# Altium PCB ahrs_v0.1.PcbDoc
Units mil, origin at the board's own origin, x right, y up, seen from the top; angles counter-clockwise.
Board outline 800 x 550 mil, 2 copper layers (Top Layer, Bottom Layer); 25 components, 35 nets, 127 pads, 20 vias.
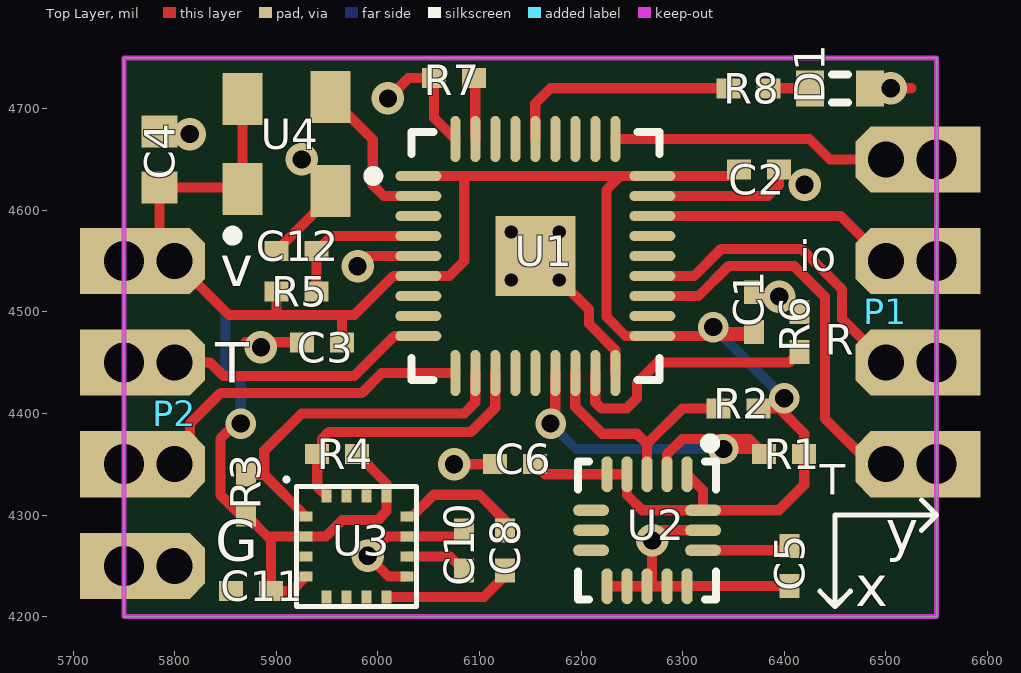
[diagram p0: Top Layer view]
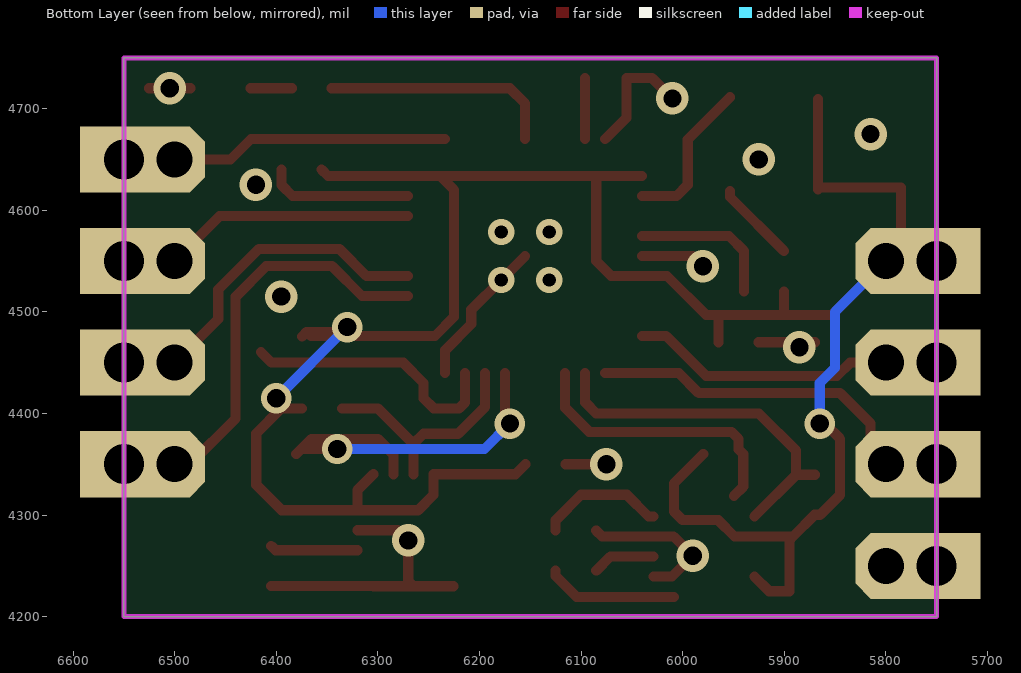
[diagram p1: Bottom Layer view, seen from below]

## Layer stack, top to bottom
Top Layer: signal copper 1.4
Dielectric: dielectric 12.6, FR-4, Dk 4.8
Bottom Layer: signal copper 1.4

## Board outline
5750,4200 6550,4200 6550,4750 5750,4750

## Design rules (kind name [scope] priority, off if disabled: settings)
AssemblyTestPointUsage [All] p0: scope1count=1 scope1_0_kind=Board scope1_0_value=Board scope2count=1 scope2_0_kind=Board scope2_0_value=Board commentlength=0
AssemblyTestpoint [All] p0: scope1count=1 scope1_0_kind=Board scope1_0_value=Board scope2count=1 scope2_0_kind=Board scope2_0_value=Board commentlength=0
Clearance [All] p0: scope1count=1 scope1_0_kind=Board scope1_0_value=Board scope2count=1 scope2_0_kind=Board scope2_0_value=Board commentlength=0 gap=7
Clearance [All] p1: gap=7
ComponentClearance [All] p0: scope1count=1 scope1_0_kind=Board scope1_0_value=Board scope2count=1 scope2_0_kind=Board scope2_0_value=Board commentlength=0 gap=0 collisioncheckmode=3
ComponentClearance [All] p1: gap=0 collisioncheckmode=3 verticalgap=0 showdistances=FALSE
DiffPairsRouting [All] p0: scope1count=1 scope1_0_kind=Board scope1_0_value=Board scope2count=1 scope2_0_kind=Board scope2_0_value=Board commentlength=0
FabricationTestPointUsage [All] p0: scope1count=1 scope1_0_kind=Board scope1_0_value=Board scope2count=1 scope2_0_kind=Board scope2_0_value=Board commentlength=0 valid=0 allowmultiple=FALSE
FabricationTestpoint [All] p0: scope1count=1 scope1_0_kind=Board scope1_0_value=Board scope2count=1 scope2_0_kind=Board scope2_0_value=Board commentlength=0 side=3 testpointundercomponent=TRUE minsize=40 maxsize=100 preferedsize=60 minholesize=0 maxholesize=40 preferedholesize=32 testpointgrid=1
FanoutControl Fanout_BGA [All] p0 off: scope1count=1 scope1_0_kind=Board scope1_0_value=Board scope2count=1 scope2_0_kind=Board scope2_0_value=Board commentlength=69 // Protel DXP Scope 1 Expression Was: IsBGA   Fanout_BGA (Default Rule)
FanoutControl Fanout_LCC [All] p0 off: scope1count=1 scope1_0_kind=Board scope1_0_value=Board scope2count=1 scope2_0_kind=Board scope2_0_value=Board commentlength=69 // Protel DXP Scope 1 Expression Was: IsLCC   Fanout_LCC (Default Rule)
FanoutControl Fanout_SOIC [All] p0 off: scope1count=1 scope1_0_kind=Board scope1_0_value=Board scope2count=1 scope2_0_kind=Board scope2_0_value=Board commentlength=71 // Protel DXP Scope 1 Expression Was: IsSOIC   Fanout_SOIC (Default Rule)
FanoutControl Fanout_Small [All] p0 off: scope1count=1 scope1_0_kind=Board scope1_0_value=Board scope2count=1 scope2_0_kind=Board scope2_0_value=Board commentlength=84 // Protel DXP Scope 1 Expression Was: (CompPinCount < 5)   Fanout_Small (Default Rule)
FanoutControl Fanout_Default [All] p0: scope1count=1 scope1_0_kind=Board scope1_0_value=Board scope2count=1 scope2_0_kind=Board scope2_0_value=Board commentlength=30 // Fanout_Default (Default Rule)
Height [All] p0: scope1count=1 scope1_0_kind=Board scope1_0_value=Board scope2count=1 scope2_0_kind=Board scope2_0_value=Board commentlength=0
HoleSize [All] p0: scope1count=1 scope1_0_kind=Board scope1_0_value=Board scope2count=1 scope2_0_kind=Board scope2_0_value=Board commentlength=0 absolutevalues=TRUE maxlimit=300 minlimit=0 maxpercent=80.000 minpercent=20.000
HoleSize [All] p1: absolutevalues=TRUE maxlimit=300 minlimit=0 maxpercent=80.000 minpercent=20.000
HoleToHoleClearance [All] p0: scope1count=1 scope1_0_kind=Board scope1_0_value=Board scope2count=1 scope2_0_kind=Board scope2_0_value=Board commentlength=0
LayerPairs [All] p0: scope1count=1 scope1_0_kind=Board scope1_0_value=Board scope2count=1 scope2_0_kind=Board scope2_0_value=Board commentlength=0 enforce=TRUE
MinimumSolderMaskSliver [All] p0: scope1count=1 scope1_0_kind=Board scope1_0_value=Board scope2count=1 scope2_0_kind=Board scope2_0_value=Board commentlength=0
MinimumSolderMaskSliver [All] p1: minsoldermaskwidth=1
NetAntennae [All] p0: scope1count=1 scope1_0_kind=Board scope1_0_value=Board scope2count=1 scope2_0_kind=Board scope2_0_value=Board commentlength=0
PasteMaskExpansion [All] p0: scope1count=1 scope1_0_kind=Board scope1_0_value=Board scope2count=1 scope2_0_kind=Board scope2_0_value=Board commentlength=0 expansion=0
PlaneClearance [All] p0: scope1count=1 scope1_0_kind=Board scope1_0_value=Board scope2count=1 scope2_0_kind=Board scope2_0_value=Board commentlength=0 clearance=20
PlaneConnect [All] p0: scope1count=1 scope1_0_kind=Board scope1_0_value=Board scope2count=1 scope2_0_kind=Board scope2_0_value=Board commentlength=0 planeconnectstyle=Relief reliefexpansion=20 reliefentries=4 reliefconductorwidth=20 reliefairgap=10
PlaneConnect [All] p1: planeconnectstyle=Relief reliefexpansion=20 reliefentries=4 reliefconductorwidth=20 reliefairgap=10
PolygonConnect [All] p0: scope1count=1 scope1_0_kind=Board scope1_0_value=Board scope2count=1 scope2_0_kind=Board scope2_0_value=Board commentlength=0 connectstyle=Direct reliefconductorwidth=20 reliefentries=4 polygonreliefangle="90 Angle"
PolygonConnect [All] p1: connectstyle=Direct reliefconductorwidth=20 reliefentries=4 polygonreliefangle="90 Angle" airgapwidth=10
RoomDefinition stm32f103t8u6 [All] p0: scope1count=1 scope1_0_kind=ComponentClass scope1_0_value=stm32f103t8u6 scope2count=1 scope2_0_kind=Board scope2_0_value=Board commentlength=0 region_x1=53150000 region_y1=51950000 region_x2=73150000 region_y2=61950000 confinementstyle=ConfineOut
RoomDefinition stm32f103t8u6 [InComponentClass('stm32f103t8u6')] p1: confinementstyle=ConfineOut formatcopy=TRUE lockcomponents=FALSE outline 5315,5195 7315,5195 7315,6195 5315,6195
RoutingCorners [All] p0: scope1count=1 scope1_0_kind=Board scope1_0_value=Board scope2count=1 scope2_0_kind=Board scope2_0_value=Board commentlength=0 cornerstyle=45-Degree minsetback=100 maxsetback=100
RoutingLayers [All] p0: scope1count=1 scope1_0_kind=Board scope1_0_value=Board scope2count=1 scope2_0_kind=Board scope2_0_value=Board commentlength=0 top layer=Automatic bottom layer=Automatic
RoutingPriority [All] p0: scope1count=1 scope1_0_kind=Board scope1_0_value=Board scope2count=1 scope2_0_kind=Board scope2_0_value=Board commentlength=0
RoutingTopology [All] p0: scope1count=1 scope1_0_kind=Board scope1_0_value=Board scope2count=1 scope2_0_kind=Board scope2_0_value=Board commentlength=0 topology=Shortest
RoutingVias [All] p0: scope1count=1 scope1_0_kind=Board scope1_0_value=Board scope2count=1 scope2_0_kind=Board scope2_0_value=Board commentlength=0 holewidth=28 width=50 viastyle="Through Hole" minholewidth=2 minwidth=5 maxholewidth=280 maxwidth=500
RoutingVias [All] p1: holewidth=28 width=50 viastyle="Through Hole" minholewidth=2 minwidth=5 maxholewidth=280 maxwidth=500
ShortCircuit [All] p0: scope1count=1 scope1_0_kind=Board scope1_0_value=Board scope2count=1 scope2_0_kind=Board scope2_0_value=Board commentlength=0 allowed=FALSE
SilkToSilkClearance [All] p0: scope1count=1 scope1_0_kind=Board scope1_0_value=Board scope2count=1 scope2_0_kind=Board scope2_0_value=Board commentlength=0
SilkToSilkClearance [All] p1: silktosilkclearance=0
SilkscreenOverComponentPads [All] p0 off: scope1count=1 scope1_0_kind=Board scope1_0_value=Board scope2count=1 scope2_0_kind=Board scope2_0_value=Board commentlength=44 // Protel DXP Scope 1 Expression Was: IsPad
SilkscreenOverComponentPads [IsPad] p1: minsilkscreentomaskgap=0
SolderMaskExpansion [All] p0: scope1count=1 scope1_0_kind=Board scope1_0_value=Board scope2count=1 scope2_0_kind=Board scope2_0_value=Board commentlength=0 expansion=4
SolderMaskExpansion [All] p1: expansion=4
UnRoutedNet [All] p0: scope1count=1 scope1_0_kind=Board scope1_0_value=Board scope2count=1 scope2_0_kind=Board scope2_0_value=Board commentlength=0
Width [All] p0: scope1count=1 scope1_0_kind=Board scope1_0_value=Board scope2count=1 scope2_0_kind=Board scope2_0_value=Board commentlength=0 maxlimit=1000 minlimit=10 preferedwidth=20
Width [All] p1: maxlimit=1000 minlimit=10 preferedwidth=20 minimp=50.000000 maximp=50.000000 favimp=50.000000
22 further rules are at their usual default settings.

## Components (designator, comment, footprint, x,y, rotation, side; value= is the part's Value field where it differs from the comment)
C1 "104" 0402 6370,4500 r270 top
C2 "104" 0402 6375,4640 r180 top
C3 "104" 0402 5945,4470 r0 top
C4 "10u" 1608[0603] 5785,4650 r270 top
C5 "104" 0402 6405,4250 r270 top
C6 "104" 0402 6135,4350 r180 top
C8 "104" 0402 6125,4265 r90 top
C10 "104" 0402 6085,4265 r90 top
C11 "104" 0402 5875,4225 r180 top
C12 "104" 0402 5920,4560 r180 top
D1 "红LED" J1-0603 6455,4720 r0 top
P1 "debug" HDR1X4 6500,4650 r270 top
P2 "out" HDR1X4 5800,4550 r270 top
R1 "2K" 0402 6400,4360 r180 top
R2 "2K" 0402 6355,4405 r180 top
R3 "2K" 0402 5870,4320 r90 top
R4 "2K" 0402 5960,4360 r180 top
R5 "2k" 0402 5920,4520 r0 top
R6 "2k" 0402 6415,4480 r270 top
R7 "2k" 0402 6075,4730 r180 top
R8 "2K" 0402 6365,4720 r180 top
U1 "STM32F103T8U6" VFQN-36 6155,4555 r0 top
U2 "ICM-20602" LC-LGA-16_3x3mm 6265,4285 r180 top
U3 "QMC5883L" PCBComponent_1 5920,4210 r0 top
U4 "有源8MHz晶振 3225" 有源贴片晶振(3225) 5910,4665 r90 top

## Footprints (in the part's own frame and the unit in brackets; to place one, negate y for a bottom-side part, rotate by r counter-clockwise, add the part's x,y. Pads: shape width x height; smd on the part's side, far side on the other; paste and mask are expansions set on the pad)
0402 [mm] "Chip Capacitor, Body 1.0x0.5mm, IPC High Density"
  rect 0.6x0.5 smd: 1(-0.5,0) 2(0.5,0)
1608[0603] [mm] "Chip Capacitor, Body 1.6x0.8mm, IPC High Density"
  rect 0.8x0.9 smd: 1(-0.7,0) 2(0.7,0)
HDR1X4 [mil] "Connector; Header; 4 Position"
  oct 65x60 hole 35.43: 1(0,0) 2(100,0) 3(200,0) 4(300,0)
J1-0603 [mm] "Chip Resistor, Body 1.6x0.8mm, IPC High Density"
  rect 0.7x0.9 smd: 1(-0.75,0) 2(0.75,0)
  silkscreen extent -0.2,-0.35 0.2,0.35
LC-LGA-16_3x3mm [mm]
  oval 0.28x0.9 smd mask+0.051: 1(-1,-1.4) 2(-0.5,-1.4) 3(0,-1.4) 4(0.5,-1.4) 5(1,-1.4) 9(1,1.4) 10(0.5,1.4) 11(0,1.4) 12(-0.5,1.4) 13(-1,1.4)
  oval 0.9x0.28 smd mask+0.051: 6(1.4,-0.5) 7(1.4,0) 8(1.4,0.5) 14(-1.4,0.5) 15(-1.4,0) 16(-1.4,-0.5)
  silkscreen extent -1.73,-2.3 1.73,1.73
PCBComponent_1 [mm]
  rect 0.325x0.25 smd: 1(0.238,2.25) 2(0.238,1.75) 3(0.238,1.25) 4(0.238,0.75) 9(2.762,0.75) 10(2.762,1.25) 11(2.762,1.75) 12(2.762,2.25)
  rect 0.25x0.325 smd: 5(0.75,0.238) 6(1.25,0.238) 7(1.75,0.238) 8(2.25,0.238) 13(2.25,2.762) 14(1.75,2.762) 15(1.25,2.762) 16(0.75,2.762)
  silkscreen extent -0.25,0 3,3.18
VFQN-36 [mm] "QFN, 36-Leads, Body 6x6mm, Pitch 0.5mm, IPC Low Density"
  oval 1.15x0.25 smd: 1(-2.925,2) 2(-2.925,1.5) 3(-2.925,1) 4(-2.925,0.5) 5(-2.925,0) 6(-2.925,-0.5) 7(-2.925,-1) 8(-2.925,-1.5) 9(-2.925,-2) 19(2.925,-2) 20(2.925,-1.5) 21(2.925,-1) 22(2.925,-0.5) 23(2.925,0) 24(2.925,0.5) 25(2.925,1) 26(2.925,1.5) 27(2.925,2)
  rect 2x2 smd: 5(0,0)
  oval 0.25x1.15 smd: 10(-2,-2.925) 11(-1.5,-2.925) 12(-1,-2.925) 13(-0.5,-2.925) 14(0,-2.925) 15(0.5,-2.925) 16(1,-2.925) 17(1.5,-2.925) 18(2,-2.925) 28(2,2.925) 29(1.5,2.925) 30(1,2.925) 31(0.5,2.925) 32(0,2.925) 33(-0.5,2.925) 34(-1,2.925) 35(-1.5,2.925) 36(-2,2.925)
  silkscreen extent -4.17,-3.1 3.1,3.1
有源贴片晶振(3225) [mm]
  rect 1.3x1 smd: 1(-1.125,1.1) 2(-1.175,-1.1) 3(1.175,-1.1) 4(1.125,1.1)
  silkscreen extent -2.41,1.22 -2.16,1.47

## Part data
C1 C2 C3 C4 C8 C10 C12: library part Cap, "Capacitor"
C5 C6 C11: library part "Cap Semi", "Capacitor (Semiconductor SIM Model)"
D1: library part LED2, "Typical RED, GREEN, YELLOW, AMBER GaAs LED"
P1 P2: library part "Header 4", "Header, 4-Pin"
R1 R2 R3 R4 R8: library part Res3, "Resistor"
R5: library part "Res Semi", "Semiconductor Resistor"
R6 R7: library part Res2, "Resistor"
U1: "STM32 ARM-based 32-bit MCU with 64 Kbytes Flash, 36-pin VFQFPN, Industrial Temperature"
U4: library part 贴片有源晶振

## Free pads (board coordinates)
  rect 86.61x65 hole 39.37: 0(5750,4250) 0(5750,4350) 0(5750,4450) 0(5750,4550) 0(6550,4350) 0(6550,4450) 0(6550,4550) 0(6550,4650)

## Via types
v1: diameter 32, hole 18, Top Layer to Bottom Layer, 11 vias
v2: diameter 30, hole 18, Top Layer to Bottom Layer, 5 vias
v3: diameter 25.98, hole 12.99, Top Layer to Bottom Layer, tented top, 4 vias

## Nets (pads, with @x,y where several pads share a name; then routed paths per layer and width w, separated by ;. In a path a pad name is that pad's centre, name@x,y a point inside that pad or via, vN(x,y) a via of type N, cw(c..) or ccw(c..) an arc to the next point about the centre after c; other vN are vias at no path point)
BOOT0: R7.1 U1.35 | length 59.8
  Top Layer w10: U1.35 R7.1@6095.94,4730
BOOT1: R6.2 U1.17 | length 264
  Top Layer w10: U1.17 6214.06,4410.94 6220,4405 6245,4405 6255,4415 6255,4430 6275,4450 6404.69,4450 R6.2
GND: C1.1 C2.1 C3.1 C4.1 C5.2 C6.2 C10.2 C11.2 C12.2 D1.2 P2.4 pad.0@5750,4250 R6.1 R7.2 U1.5 U1.18 U1.26 U1.36 U2.8 U2.9 U2.10 U2.11 U2.12 U2.13 U2.15 U3.9 U3.11 U4.2 | length 1206.9
  Top Layer w10: v1@5870,4470 C3.1 ; C12.2 5953.31,4612.99 U4.2 ; v1(5980,4545) 5990,4555 U1.5@6039.84,4555 ; v1(6010,4710) 6030,4730 R7.2 6055.31,4691.1 U1.36 ; U3.9 6010.47,4239.53 v1(5990,4260) 6008.9,4278.9 U3.11 6079.21,4278.9 C10.2 ; v1(6075,4350) C6.2 ; U1.5@6155,4555 v3(6178.62,4531.38) 6208,4502 6208,4487.96 6233.74,4462.22 U1.18 ; U2.9 U2.10 U2.11 ; U2.9@6225.63,4230.31 U2.11@6265.43,4230.31 ; U1.26 6384.06,4614.06 6394.69,4624.69 C2.1 ; U2.13 U2.12 U2.11 ; U2.15 6280,4285 v1(6270,4275) 6270,4234.88 U2.11@6265.43,4230.31 ; C5.2 U2.11@6265.43,4230.31 ; D1.2 6525,4720 ; U2.11 U2.11@6265.43,4230.31
  other v1: 5885,4465 6395,4515 6420,4625 5925,4650 5815,4675 6504.76,4720
  other v3: 6131.38,4531.38 6131.38,4578.62 6178.62,4578.62
ICM-INT: U2.6
IIC_SCK1: R1.2 U1.15 U2.2 | length 395.2
  Top Layer w10: v2(6170,4390) 6174.69,4394.69 U1.15 ; U2.2 6284.68,4359.68 6300,4375 6365.31,4375 R1.2@6375.31,4365 ; v2(6340,4365) R1.2@6375.31,4365 ; R1.2 R1.2@6375.31,4365
  Bottom Layer w10: v2(6170,4390) 6195,4365 v2(6340,4365)
IIC_SCK2: R3.2 U1.11 U3.1 | length 356.3
  Top Layer w10: R3.2 5888.27,4339.69 ; U3.1 5888.27,4339.69 ; U1.11 6095.94,4410.94 6085,4400 5925,4400 5888.27,4363.27 5888.27,4339.69
IIC_SDA1: R2.2 U1.16 U2.3 | length 233.7
  Top Layer w10: U1.16 6194.37,4406.59 6220.96,4380 6255,4380 6265,4370 ; U2.3 6265,4370 ; R2.2 6300,4405 6265,4370
IIC_SDA2: R4.2 U1.12 U3.16 | length 279.5
  Top Layer w10: U3.16 5940.31,4327.95 R4.2 5945,4364.69 5945,4375 5951.84,4381.84 6091.84,4381.84 6115.63,4405.63 U1.12
LED: R8.2 U1.32 | length 231.4
  Top Layer w10: U1.32 6155,4705 6170,4720 R8.2
NetC5_1: C5.1 U2.14 | length 86.7
  Top Layer w10: U2.14 6400.63,4265.31 C5.1
NetC8_1: C8.1 U3.8 | length 130.3
  Top Layer w10: U3.8 6104.35,4219.35 6125,4240 C8.1
NetC8_2: C8.2 U3.12 | length 125.8
  Top Layer w10: U3.12 6033.58,4298.58 6055,4320 6100,4320 6125,4295 C8.2
NetC10_1: C10.1 U3.10 | length 62
  Top Layer w10: U3.10 6071.1,4259.21 C10.1
NetD1_1: D1.1 R8.1 | length 40.8
  Top Layer w10: R8.1 D1.1
OSC0: U1.2 U4.3 | length 152.9
  Top Layer w10: U4.3 5995,4669.58 5995,4625 6005.94,4614.06 U1.2
OSC1: U1.3
PA0: U1.7
PA1: U1.8
PA2: P2.2 pad.0@5750,4450 U1.9 | length 282.7
  Top Layer w10: P2.2@5815,4435 P2.2 5835,4450 5848,4437 5977,4437 6016.26,4476.26 U1.9
PA3: P2.3 pad.0@5750,4350 U1.10 | length 328.1
  Top Layer w10: P2.3 5815,4365 5815,4390 5845,4420 5984.04,4420 6003.88,4439.84 U1.10
PA6: U1.13
PA7: U1.14
PA8: U1.20
PA9: P1.4 pad.0@6550,4350 U1.21 | length 393.1
  Top Layer w10: U1.21 6315.63,4515.63 6345,4545 6410,4545 6440,4515 6440,4395 6485,4350 P1.4
PA10: P1.3 pad.0@6550,4450 U1.22 | length 304.3
  Top Layer w10: U1.22 6311.27,4535.31 6337.96,4562 6417.04,4562 6457,4522.04 6457,4493 P1.3
PA11: U1.23
PA12: U1.24
PB3: U1.30
PB4: U1.31
PB6: U1.33
PB7: U1.34
R\E\S\E\T\: C12.1 R5.2 U1.4 | length 146.2
  Top Layer w10: R5.2 C12.1 5954.37,4574.69 U1.4
SWCLK: P1.1 pad.0@6550,4650 U1.28 | length 274.6
  Top Layer w10: U1.28 6424.84,4670.16 6445,4650 P1.1
SWDIO: P1.2 pad.0@6550,4550 U1.25 | length 248.2
  Top Layer w10: U1.25 6455.63,4594.37 P1.2
V33: C1.2 C2.2 C3.2 C4.2 C6.1 C11.1 P2.1 pad.0@5750,4550 R1.1 R2.1 R3.1 R4.1 R5.1 U1.1 U1.6 U1.19 U1.27 U2.1 U2.4 U2.5 U2.16 U3.2 U3.4 U3.13 U4.1 U4.4 | length 2568.4
  Top Layer w10: v2(5865,4390) 5860,4390 5845,4375 5845,4320 5864.69,4300.31 R3.1 5891.42,4278.9 ; U4.4 U4.1 5864.96,4622.44 C4.2 5785,4565 P2.1 5853.16,4496.84 5900.31,4496.84 ; R5.1 5900.31,4496.84 ; U3.4 5914.84,4225 C11.1 5894.69,4275.63 5891.42,4278.9 ; C3.2 5964.69,4496.53 5965,4496.84 ; R4.1 6008.58,4331.1 U3.13 6008.58,4303.58 6000,4295 5965,4295 5948.9,4278.9 U3.2 5891.42,4278.9 ; U1.1 6085,4633.74 ; C6.1 6164.57,4340.12 U2.5 U2.4 6245.31,4319.69 6260.32,4304.68 U2.16 ; U2.1 6320.12,4324.37 U2.16 ; v2(6330,4485) 6334.69,4480.31 C1.2 ; C2.2 6349.06,4633.74 U1.27 6238.74,4633.74 ; R2.1 v2@6390,4405 ; C1.2@6374.69,4475.63 C1.2 ; v2(6400,4415) v2@6390,4405 ; 5900.31,4496.84 5965,4496.84 ; 5965,4496.84 5976.84,4496.84 6015.31,4535.31 U1.6 6070.31,4535.31 6085,4550 6085,4633.74 ; 6085,4633.74 6238.74,4633.74 ; 6238.74,4633.74 6225,4620 6225,4495 6243.74,4476.26 U1.19 6365.95,4476.26 C1.2 ; U2.16 6394.68,4304.68 6419.69,4329.69 R1.1 6419.69,4380.31 6395,4405 v2@6390,4405
  Bottom Layer w10: P2.1 5850,4500 5850,4445 5865,4430 v2(5865,4390) ; v2(6330,4485) v2(6400,4415)
pads on no net: U1.29 U2.7 U3.3 U3.5 U3.6 U3.7 U3.14 U3.15

## Polygon pours and split planes (outlines as drawn)
GND on Bottom Layer "Top Layer-No Net" (solid, remove dead copper, pour order 61): 5750,4200 6550,4200 6550,4750 5750,4750
GND on Top Layer "Top Layer-No Net" (solid, remove dead copper, pour order 62): 5750,4200 6550,4200 6550,4750 5750,4750

## Keep-outs
Keep-Out Layer:
  the board outline again, w5

## Silkscreen, mask and mechanical layers (free items; w line width, h text height)
Top Overlay:
  lines w5: 6435,4225 6450,4210 ; 6465,4225 6450,4210 ; 6535,4285 6550,4300 ; 6535,4315 6550,4300 ; 6450,4210 6450,4300 6550,4300
  text "io" at 6415,4540 h30
  text "v" at 5845,4525 h40
  text "R" at 6439.65,4457.99 h30
  text "T" at 5840,4430 h40
  text "T" at 6435,4320 h30
  text "y" at 6500,4265 h40
  text "G" at 5840,4255 h40
  text "x" at 6470,4210 h40

## Text inside footprints (layer, text, board x,y; h text height)
R8: Mechanical 13 "clk" at 6385,4660 h30